# EAGLE board citizen-scientist-v3 (EAGLE 9.6.2)
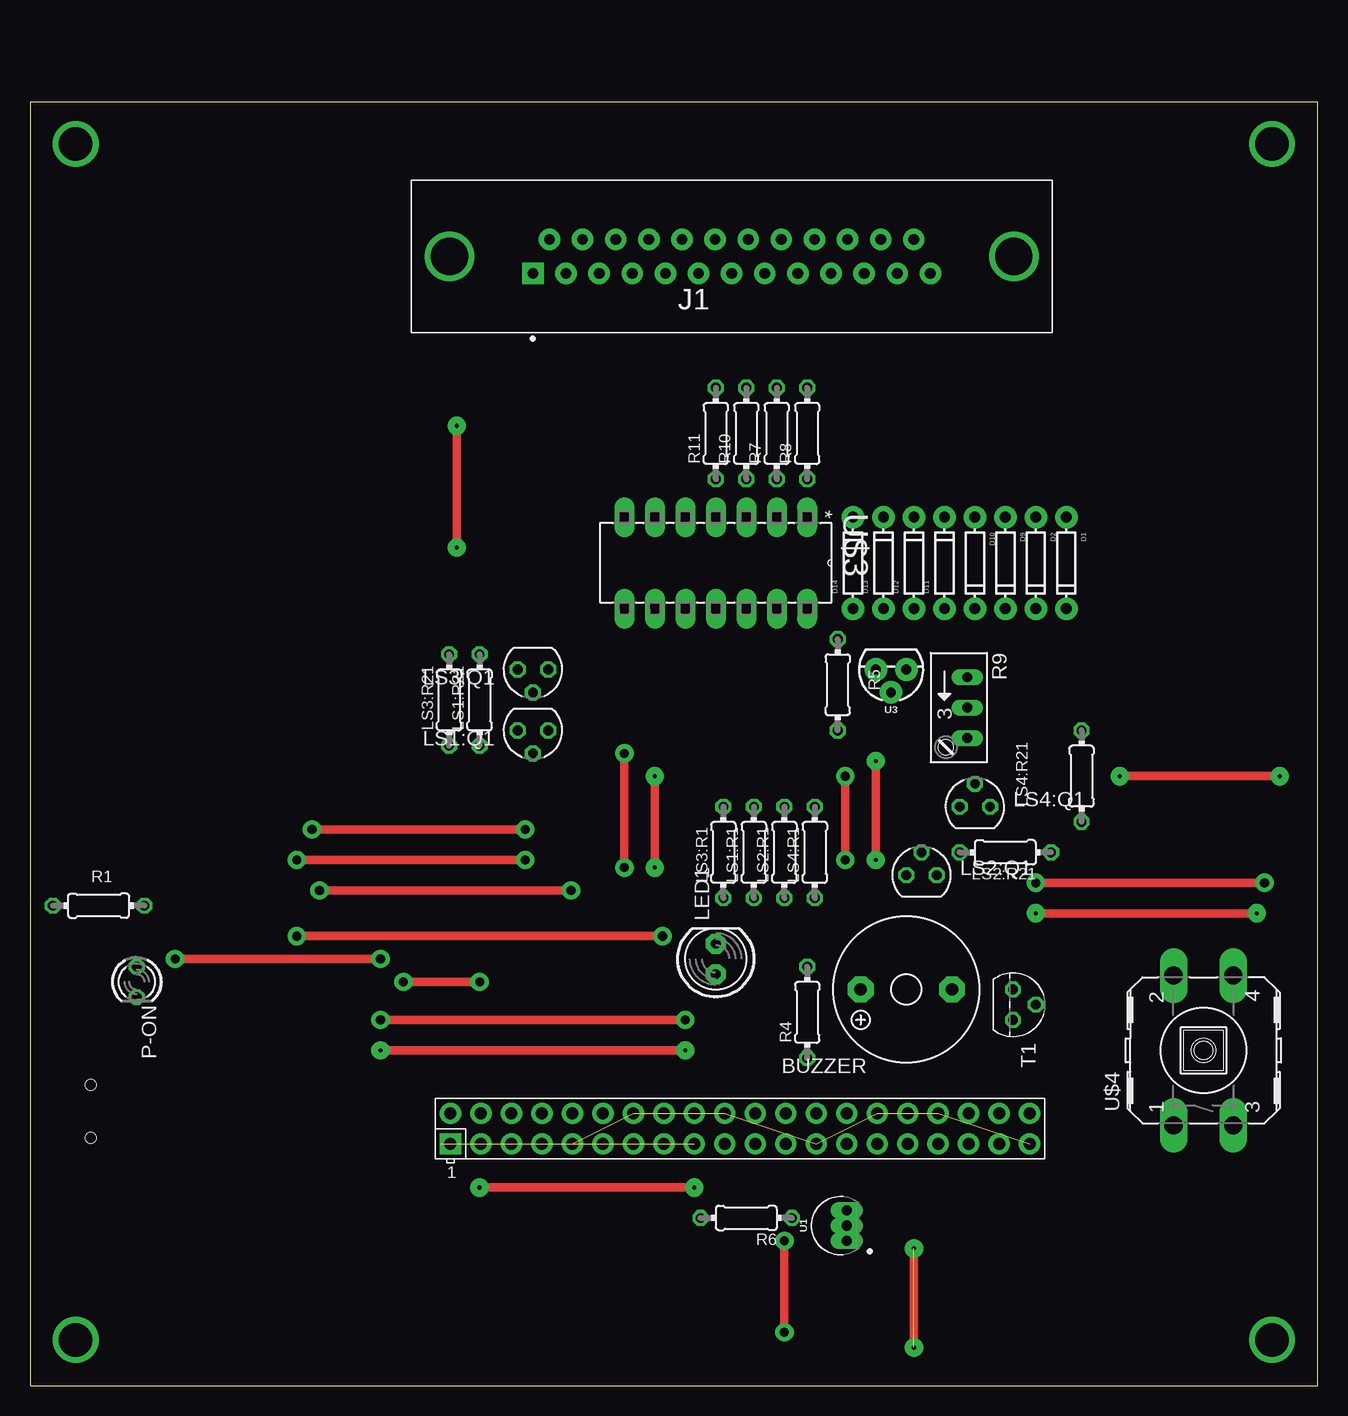
[diagram p0: board, top side]
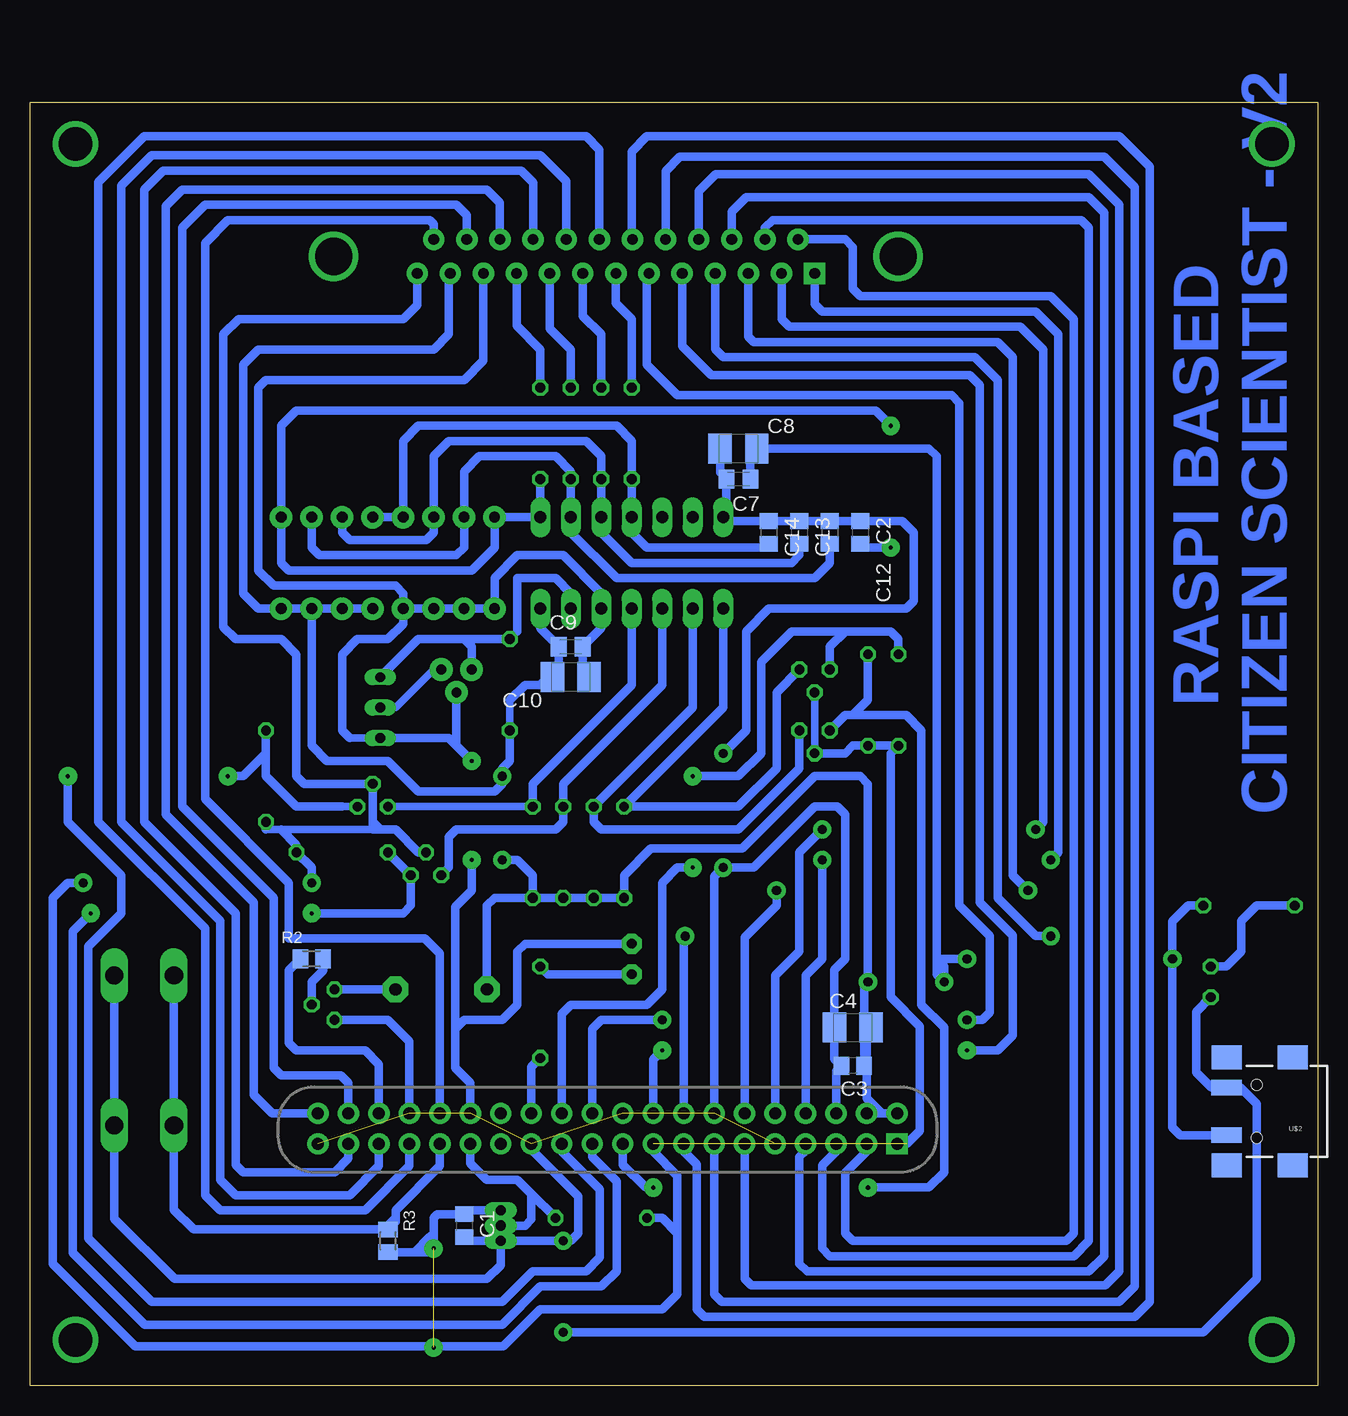
[diagram p1: board, bottom side, seen from below]

Size 107.3 x 106.98 mm. Coordinates in mm from the lower left corner, seen from the top.
Outline: 0,0 107.3,0 107.3,106.98 0,106.98 0,0
Copper layers (1*16): Top 0.035mm / dielectric 1.5mm / Bottom 0.035mm
Design rules "default *": minimum track width 6mil, minimum drill 0.35mm, track to track 6mil, track to pad 6mil, pad to pad 6mil, via to via 6mil, smd to smd 6mil, copper to edge 40mil, drill to drill 6mil, minimum pad ring 10mil, minimum via ring 8mil, stop-mask expansion 4mil, vias tented up to drill 0mil, thermal gap 10mil
Net classes: 0 default: width 0.406 mm

## Footprints (pad centres in the part's own frame; a part is rotated, then mirrored left to right if it is on the bottom)
F/TMB = drill 1.016 pad 2.159 octagon: + 3.81,0; - -3.81,0
C0805 = smd 1.3 x 1.5: 1 -0.95,0; 2 0.95,0
B/3528-21R = smd 1.95 x 2.5: + 1.525,0; - -1.525,0
C0805K = smd 1.3 x 1.6: 1 -1,0; 2 1,0
DIODE-1N4148 = drill 0.9 pad 1.88: A -3.81,0; C 3.81,0
D25S24A4GV00LF = drill 0.9 pad 1.778 square: 1 0,0 | drill 0.9 pad 1.778: 2 -2.76,0; 3 -5.52,0; 4 -8.28,0; 5 -11.04,0; 6 -13.8,0; 7 -16.56,0; 8 -19.32,0; 9 -22.08,0; 10 -24.84,0; 11 -27.6,0; 12 -30.36,0; 13 -33.12,0; 14 -1.38,-2.84; 15 -4.14,-2.84; 16 -6.9,-2.84; 17 -9.66,-2.84; 18 -12.42,-2.84; 19 -15.18,-2.84; 20 -17.94,-2.84; 21 -20.7,-2.84; 22 -23.46,-2.84; 23 -26.22,-2.84; 24 -28.98,-2.84; 25 -31.74,-2.84 | drill 3.1: MH1 -40.08,-1.42; MH2 6.96,-1.42
LED5MM = drill 0.813 pad 1.676 octagon: A -1.27,0; K 1.27,0
SOT54E = drill 0.813 octagon: D -1.27,0; G 0,1.905; S 1.27,0
0204/7 = drill 0.813 octagon: 1 -3.81,0; 2 3.81,0
LED3MM = drill 0.813 octagon: A -1.27,0; K 1.27,0
M0805 = smd 1.3 x 1.6: 1 -0.95,0; 2 0.95,0
RJ9W = drill 0.813 long: A 2.54,0.635; E -2.54,0.635; S 0,0.635
TO92 = drill 0.813 octagon: 1 1.27,0; 2 0,1.905; 3 -1.27,0
TO-92-TO92127P495H2044-3 = drill 0.85 pad 1.016 long: 1 -1.27,-0.76; 2 0,-0.76; 3 1.27,-0.76
TO-92 = drill 0.813 pad 1.88: 1 -1.27,0; 2 0,1.905; 3 1.27,0
RASP_PI_ZERO_BOARD_FULL = drill 1 pad 1.778 square: 1 8.37,25.23 | drill 1 pad 1.778: 2 8.37,27.77; 3 10.91,25.23; 4 10.91,27.77; 5 13.45,25.23; 6 13.45,27.77; 7 15.99,25.23; 8 15.99,27.77; 9 18.53,25.23; 10 18.53,27.77; 11 21.07,25.23; 12 21.07,27.77; 13 23.61,25.23; 14 23.61,27.77; 15 26.15,25.23; 16 26.15,27.77; 17 28.69,25.23; 18 28.69,27.77; 19 31.23,25.23; 20 31.23,27.77; 21 33.77,25.23; 22 33.77,27.77; 23 36.31,25.23; 24 36.31,27.77; 25 38.85,25.23; 26 38.85,27.77; 27 41.39,25.23; 28 41.39,27.77; 29 43.93,25.23; 30 43.93,27.77; 31 46.47,25.23; 32 46.47,27.77; 33 49.01,25.23; 34 49.01,27.77; 35 51.55,25.23; 36 51.55,27.77; 37 54.09,25.23; 38 54.09,27.77; 39 56.63,25.23; 40 56.63,27.77
USB(POWER) = smd 2.54 x 1.27: GND 2.5,-1.981; VBUS 2.5,1.981 | smd 2.5 x 2: GND@1 -3,-4.5; GND@2 -3,4.5; GND@3 2.5,4.5; GND@4 2.5,-4.5 | hole 0.9: 0,2.2; 0,-2.2
DIP254P762X432-14 = drill 0.991 pad 1.676 long: 1 -7.62,15.24; 2 -7.62,12.7; 3 -7.62,10.16; 4 -7.62,7.62; 5 -7.62,5.08; 6 -7.62,2.54; 7 -7.62,0; 8 0,0; 9 0,2.54; 10 0,5.08; 11 0,7.62; 12 0,10.16; 13 0,12.7; 14 0,15.24
B3F-40XX = drill 1.524 long: 1 -6.248,2.489; 2 6.248,2.489; 3 -6.248,-2.489; 4 6.248,-2.489

## Placement (x,y rotation side)
BUZZER  BUZZER  [F/TMB]  73.03,33.02 180 top
C1  0.1u  [C0805]  71.12,13.34 270 bottom
C2  1n  [C0805]  38.1,71.12 270 bottom
C3  0.1u  [C0805]  38.73,26.67 180 bottom
C4  10u  [B/3528-21R]  38.73,29.84 0 bottom
C7  0.1u  [C0805K]  48.26,75.56 180 bottom
C8  10u  [B/3528-21R]  48.26,78.11 0 bottom
C9  0.1u  [C0805K]  62.23,61.59 0 bottom
C10  10u  [B/3528-21R]  62.23,59.05 180 bottom
C12  1n  [C0805]  40.64,71.12 270 bottom
C13  1n  [C0805]  43.18,71.12 270 bottom
C14  1n  [C0805]  45.72,71.12 270 bottom
D1  [DIODE-1N4148]  86.36,68.58 270 top
D2  [DIODE-1N4148]  83.82,68.58 270 top
D9  [DIODE-1N4148]  81.28,68.58 270 top
D10  [DIODE-1N4148]  78.74,68.58 270 top
D11  [DIODE-1N4148]  76.2,68.58 90 top
D12  [DIODE-1N4148]  73.66,68.58 90 top
D13  [DIODE-1N4148]  71.12,68.58 90 top
D14  [DIODE-1N4148]  68.58,68.58 90 top
J1  D25S24A4GV00LF  [D25S24A4GV00LF]  41.91,92.71 180 top
LED1  [LED5MM]  57.15,35.56 90 top
LS1:Q1  BS170  [SOT54E]  41.91,54.61 180 top
LS1:R1  10k  [0204/7]  60.33,44.45 90 top
LS1:R21  10k  [0204/7]  37.47,57.15 90 top
LS2:Q1  BS170  [SOT54E]  74.3,42.55 0 top
LS2:R1  10k  [0204/7]  62.87,44.45 90 top
LS2:R21  10k  [0204/7]  81.28,44.45 180 top
LS3:Q1  BS170  [SOT54E]  41.91,59.69 180 top
LS3:R1  10k  [0204/7]  57.78,44.45 90 top
LS3:R21  10k  [0204/7]  34.92,57.15 90 top
LS4:Q1  BS170  [SOT54E]  78.74,48.26 0 top
LS4:R1  10k  [0204/7]  65.41,44.45 90 top
LS4:R21  10k  [0204/7]  87.63,50.8 90 top
P-ON  LED3MM  [LED3MM]  8.89,33.66 270 top
R1  4.7k  [0204/7]  5.71,40.01 0 top
R2  1k  [M0805]  83.82,35.56 0 bottom
R3  10k  [M0805]  77.47,12.06 270 bottom
R4  2.2k  [0204/7]  64.77,31.11 90 top
R5  150  [0204/7]  67.31,58.42 270 top
R6  4.7k  [0204/7]  59.69,13.97 180 top
R7  3.3k  [0204/7]  62.23,79.38 90 top
R8  3.3k  [0204/7]  64.77,79.38 90 top
R9  10k  [RJ9W]  77.47,56.52 270 top
R10  3.3k  [0204/7]  59.69,79.38 90 top
R11  3.3k  [0204/7]  57.15,79.38 90 top
T1  BC547  [TO92]  81.92,31.75 270 top
U1  DS18B20  [TO-92-TO92127P495H2044-3]  67.31,13.34 90 top
U3  TL431PTH  [TO-92]  71.75,59.69 180 top
U$1  RPI-ZERO  [RASP_PI_ZERO_BOARD_FULL]  26.67,-5.08 0 top
U$2  USB(POWER)  [USB(POWER)]  5.08,22.86 180 bottom
U$3  MCP3204-CI/P  [DIP254P762X432-14]  49.53,64.77 270 top
U$4  OMRON_SWITCH_40-XX  [B3F-40XX]  97.79,27.94 90 top

## Library data of the parts
BUZZER = CEDT_JANUARY_2015_v5; OC_FARNELL: unknown; OC_NEWARK: unknown
C1-C4 C7-C10 C12-C14 = rcl; SPICEPREFIX: C
D1 D2 D9-D14 = BeagleBone_Blue_R3
J1 = Connector_D-Sub; CATEGORY: Connector; DESCRIPTION: 25 Position D-Sub Receptacle, Female Sockets Connector; GENDER: Female; MANUFACTURER: amphenol-icc; MPN: D25S24A4GV00LF; OPERATING_TEMP: -55°C to +125°C; PART_STATUS: Active; ROHS_COMPLIANT: EU RoHS With Exemption 6c; SERIES: DELTA D; SUB-CATEGORY: D-SUB; TYPE: Vertical
LED1 = adafruit
LS1:Q1 LS2:Q1 LS3:Q1 LS4:Q1 = transistor-small-signal
LS1:R1 LS1:R21 LS2:R1 LS2:R21 LS3:R1 LS3:R21 LS4:R1 LS4:R21 R1-R8 R10 R11 = rcl; SPICEPREFIX: R
P-ON U$2 U$4 = CEDT_JANUARY_2015_v5
R9 = pot
T1 = transistor
U1 = DS18B20; AVAILABILITY: In Stock; DESCRIPTION: Temperature Sensor Digital, Local -55°C ~ 125°C 12 b 8-uMAX-EP|8-uSOP-EP; MF: Maxim; MP: DS18B20; PACKAGE: TO-226-3 Maxim; PRICE: None; PURCHASE-URL: https://pricing.snapeda.com/search/part/DS18B20/?ref=eda
U3 = SparkFun-DiscreteSemi; PROD_ID: IC-10947; SF_ID: COM-11078
U$1 = rpi-zero
U$3 = MCP3204-CI_P; AVAILABILITY: In Stock; DESCRIPTION: 12 Bit Analog to Digital Converter 2, 4 Input 1 SAR 14-PDIP; MF: Microchip; MP: MCP3204-CI/P; PACKAGE: DIP-14 Microchip; PRICE: None; PURCHASE-URL: https://pricing.snapeda.com/search/part/MCP3204-CI/P/?ref=eda

## Nets
+3V3: C1.1 J1.13 LS1:Q1.G LS1:R21.1 LS2:Q1.G LS2:R21.1 LS3:Q1.G LS3:R21.1 LS4:Q1.G LS4:R21.1 R3.2 R6.2 U1.3 U$1.1 U$1.17
+5V: BUZZER.+ C3.1 C4.+ C7.1 C8.+ C9.1 C10.+ D1.C D2.C D9.C D10.C J1.12 LS1:R1.1 LS2:R1.1 LS3:R1.1 LS4:R1.1 R1.2 R5.2 U$1.2 U$1.4 U$2.VBUS U$3.14
ADC-0: J1.10 R8.2
ADC-1: J1.9 R7.2
ADC-2: J1.8 R10.2
ADC-3: J1.7 R11.2
BUTTON: R3.1 U$1.31 U$4.1 U$4.2
BUZZER: R2.1 U$1.36
CLK-3: LS4:Q1.S LS4:R21.2 U$1.23
CLK-5: LS4:Q1.D LS4:R1.2 U$3.11
CS-3: LS3:Q1.S LS3:R21.2 U$1.24
CS-5: LS3:Q1.D LS3:R1.2 U$3.8
GCKL: J1.16 U$1.7
GND: C1.2 C2.1 C3.2 C4.- C7.2 C8.- C9.2 C10.- C12.1 C13.1 C14.1 D11.A D12.A D13.A D14.A J1.11 LED1.K P-ON.K R9.A T1.1 U1.1 U3.2 U$1.6 U$1.9 U$1.14 U$1.20 U$1.25 U$1.30 U$1.34 U$1.39 U$2.GND U$3.7 U$3.12 U$4.3 U$4.4
IO17: J1.17 U$1.11
IO22: J1.19 U$1.15
IO23: J1.4 U$1.16
IO24: J1.5 U$1.18
IO25: J1.6 U$1.22
IO26: J1.22 U$1.37
IO27: J1.18 U$1.13
LED: R4.1 U$1.26
MISO-3: LS2:Q1.S LS2:R21.2 U$1.21
MISO-5: LS2:Q1.D LS2:R1.2 U$3.10
MOSI-3: LS1:Q1.S LS1:R21.2 U$1.19
MOSI-5: LS1:Q1.D LS1:R1.2 U$3.9
N$1: P-ON.A R1.1
N$2: U$1.27
N$4: U$1.28
N$8: R9.S U3.1
N$9: R5.1 R9.E U3.3 U$3.13
N$10: R2.2 T1.2
N$11: BUZZER.- T1.3
N$12: C2.2 D1.A D14.C R8.1 U$3.1
N$13: LED1.A R4.2
N$14: C12.2 D2.A D13.C R7.1 U$3.2
N$16: C13.2 D9.A D12.C R10.1 U$3.3
N$17: C14.2 D10.A D11.C R11.1 U$3.4
PWM0: J1.25 U$1.32
PWM1: J1.20 U$1.33
SCL: J1.15 U$1.5
SDA: J1.14 U$1.3
SPI1-CLK: J1.23 U$1.40
SPI1-CS: J1.3 U$1.12
SPI1-MISO: J1.21 U$1.35
SPI1-MOSI: J1.24 U$1.38
TEMP: R6.1 U1.2 U$1.29
UART-RX: J1.2 U$1.10
UART-TX: J1.1 U$1.8

## Tracks (layer width: path | path; a pad name or v marks a point on that pad's centre or on a via)
+3V3  (via drill 0.35 pad 1.52, 0.76 pad 1.52)  (2 unrouted)
  Top 0.711: v73.66,11.43 v73.66,3.17 | v83.82,41.91 v102.87,41.91
  Bottom 0.61: LS3:Q1.G LS1:Q1.G | 87.63,46.35 86.36,46.35 78.74,46.35
  Bottom 0.711: LS1:Q1.G 39.37,52.7 38.73,53.34 LS1:R21.1 LS3:R21.1 35.56,52.7 35.56,32.38 33.13,29.96 33.13,21.25 34.23,20.15 U$1.1 | U$1.17 55.36,19.52 53.34,17.5 53.34,12.7 | 53.34,12.7 53.34,7.62 54.61,6.35 64.77,6.35 67.84,3.28 73.56,3.28 | v102.87,41.91 104.14,41.91 105.41,40.64 105.41,10.16 98.53,3.28 73.56,3.28 | v83.82,41.91 83.82,43.18 LS2:R21.1 85.09,45.09 86.36,46.35 | 87.63,46.35 LS4:R21.1 | LS2:Q1.G 74.93,44.45 76.83,46.35 78.11,46.35 | 78.11,46.35 78.74,46.35 78.74,46.99 | J1.13 75.03,90.07 76.2,88.9 89.92,88.9 91.19,87.63 91.19,63.25 90.17,62.23 86.36,62.23 85.09,60.96 85.09,50.8 84.45,50.16 LS4:Q1.G 78.74,46.99 | R6.2 54.61,13.97 53.34,12.7 | 73.66,12.7 v73.66,11.43 | 78.74,46.99 78.11,46.35 | 73.97,12.38 75.25,11.12 R3.2 73.97,11.12 v73.66,11.43 | 73.97,12.38 73.66,12.7 | U1.3 70.8,14.61 C1.1 73.34,14.29 73.66,13.97 73.66,12.7 | 73.97,12.38 73.66,12.07 v73.66,11.43 | v73.66,3.17 73.56,3.28
+5V  (via drill 0.76 pad 1.52)
  Top 0.711: v37.47,33.66 v31.11,33.66 | v67.94,50.8 v67.94,43.81 | v29.21,35.56 v12.09,35.56
  Bottom 0.61: 67.31,57.15 R5.2
  Bottom 0.711: U$2.VBUS 11.43,20.88 12.09,21.54 v12.09,35.56 12.09,38.71 10.79,40.01 R1.2 | 36.31,22.69 37.58,23.96 37.58,26.46 | 36.31,22.69 U$1.2 | LS4:R1.1 LS2:R1.1 LS1:R1.1 LS3:R1.1 57.78,42.55 55.56,44.77 47.94,44.77 41.91,50.8 38.1,50.8 37.47,50.16 v37.47,33.66 37.78,33.34 C3.1 37.58,26.46 | LS4:R1.1 65.41,42.55 66.67,43.81 v67.94,43.81 | 31.75,35.56 31.11,34.92 v31.11,33.66 31.75,34.29 31.75,35.56 | 31.75,35.56 31.75,77.47 32.38,78.11 C8.+ 47.26,77.58 C7.1 | C4.+ 37.58,29.48 37.58,26.46 | 31.75,35.56 v29.21,35.56 | 63.5,59.69 63.23,59.96 C9.1 64.77,63.13 U$3.14 | 63.5,59.69 64.77,58.42 66.04,58.42 67.31,57.15 | R5.2 67.31,52.07 67.94,51.44 v67.94,50.8 67.94,50.16 68.58,49.53 74.93,49.53 77.47,52.07 82.55,52.07 83.82,53.34 D2.C | D2.C D9.C D10.C | D2.C D1.C 88.27,64.77 89.53,66.04 89.53,85.09 88.27,86.36 73.66,86.36 72.39,87.63 72.39,92.59 J1.12 | LS4:R1.1 68.58,40.64 69.22,40.01 BUZZER.+ | C10.+ 63.5,59.31 63.5,59.69 | U$1.4 36.31,22.69
ADC-0
  Bottom 0.711: R8.2 64.77,86.36 66.75,88.34 J1.10
ADC-1
  Bottom 0.711: R7.2 62.23,86.36 63.99,88.12 J1.9
ADC-2
  Bottom 0.711: R10.2 59.69,87.63 61.23,89.17 J1.8
ADC-3
  Bottom 0.711: R11.2 57.15,88.9 58.47,90.22 J1.7
BUTTON
  Bottom 0.711: U$1.31 73.14,18.3 76.83,14.61 76.83,13.97 | R3.1 76.83,13.65 76.83,13.97 | 76.83,13.97 77.79,13.02 93.66,13.02 95.3,14.66 U$4.1 U$4.2
BUZZER
  Bottom 0.711: U$1.36 78.22,26.04 78.22,26.48 78.22,26.79 79.38,27.94 85.09,27.94 85.72,28.57 85.72,34.6 R2.1
CLK-3  (via drill 0.35 pad 1.52)
  Top 0.711: v104.14,50.8 v90.81,50.8
  Bottom 0.61: 81.28,48.26 LS4:Q1.S
  Bottom 0.711: U$1.23 62.98,19.52 59.8,16.34 59.8,10.68 60.96,9.53 65.41,9.53 67.94,6.99 97.16,6.99 102.44,12.27 102.44,36.63 99.69,39.37 99.69,42.55 104.14,46.99 v104.14,50.8 | v90.81,50.8 89.53,50.8 87.63,52.7 LS4:R21.2 87.63,50.8 85.09,48.26 81.28,48.26
CLK-5
  Bottom 0.61: LS4:Q1.D LS4:R1.2
  Bottom 0.711: LS4:R1.2 65.41,50.16 57.15,58.42 U$3.11
CS-3  (via drill 0.35 pad 1.52)
  Top 0.711: v52.07,43.18 v52.07,50.8
  Bottom 0.711: LS3:R21.2 34.92,62.23 35.56,62.87 39.37,62.87 | LS3:Q1.S 40.64,61.59 39.37,62.87 | U$1.24 62.98,31 62.23,31.75 55.88,31.75 54.61,33.02 54.61,41.91 53.34,43.18 v52.07,43.18 | 39.37,62.87 43.81,62.87 46.35,60.33 46.35,52.7 48.26,50.8 v52.07,50.8
CS-5
  Bottom 0.711: LS3:Q1.D 45.09,57.78 45.09,51.44 48.26,48.26 LS3:R1.2 49.53,56.52 U$3.8
GCKL
  Bottom 0.711: U$1.7 42.66,19.57 43.18,19.05 43.18,10.16 42.55,9.53 19.05,9.53 17.78,10.79 17.78,97.79 19.05,99.06 47.62,99.06 48.81,97.88 J1.16
GND  (via drill 0.35 pad 1.52, 0.76 pad 1.52)  (6 unrouted)
  Top 0.711: v49.53,52.7 v49.53,43.18 | v62.87,12.06 v62.87,4.45 | v70.48,43.81 v70.48,52.07
  Bottom 0.61: 76.83,53.98 R9.A 80.64,53.98
  Bottom 0.711: P-ON.K 10.12,31.16 10.12,26.11 8.85,24.84 U$2.GND 6.43,24.84 5.08,23.5 5.08,8.89 9.53,4.45 v62.87,4.45 | U$1.14 50.28,42.43 v49.53,43.18 46.99,43.18 41.91,48.26 40.01,48.26 39.37,47.62 39.37,35.56 40.26,34.67 C4.- 40.26,27.25 C3.2 40.12,26.23 U$1.6 | U$1.25 65.52,19.68 61.59,15.76 61.59,12.7 62.23,12.06 v62.87,12.06 U1.1 | C8.- 49.78,76.09 C7.2 49.26,72.66 U$3.7 49.21,72.07 C14.1 C13.1 C12.1 C2.1 34.6,72.07 33.66,71.12 33.66,65.41 34.29,64.77 45.72,64.77 47.62,62.87 47.62,54.61 v49.53,52.7 | C10.- 60.7,59.44 61.23,59.96 C9.2 59.69,63.13 U$3.12 59.69,66.04 62.87,69.22 66.67,69.22 68.58,67.31 D14.A D13.A D12.A D11.A | 71.87,29.73 71.87,39.89 70.48,41.27 v70.48,43.81 | 71.87,29.73 71.87,26.5 70.6,25.23 U$1.30 | v70.48,52.07 71.75,53.34 | 71.75,53.34 U3.2 | J1.11 69.51,85.43 71.12,83.82 87.63,83.82 88.27,83.19 88.27,67.94 87,66.67 76.83,66.67 76.2,66.04 D11.A | 80.64,53.98 81.28,54.61 81.28,60.96 80.01,62.23 77.47,62.23 76.2,63.5 D11.A | LED1.K 66.04,36.83 66.67,36.2 66.67,31.75 67.94,30.48 71.12,30.48 71.87,29.73 | C1.2 70.8,12.06 U1.1 | U$1.34 75.68,28.69 77.47,30.48 T1.1 | U1.1 68.07,10.04 69.22,8.89 95.25,8.89 100.28,13.92 U$4.3 U$4.4 | R9.A 72.39,53.98 71.75,53.34
IO17
  Bottom 0.711: U$1.11 47.74,8.89 47.2,8.35 17.68,8.35 16.51,9.53 16.51,98.42 19.05,100.97 50.16,100.97 51.57,99.56 J1.17
IO22
  Bottom 0.711: U$1.15 52.82,19.52 51.75,18.45 51.75,6.35 51.12,5.71 15.24,5.71 13.97,6.99 13.97,101.6 16.51,104.14 55.88,104.14 57.15,102.87 57.15,95.61 J1.19
IO23  (via drill 0.76 pad 1.52)
  Top 0.711: v52.7,37.47 v22.23,37.47
  Bottom 0.711: J1.4 50.19,86.39 49.53,85.72 28.57,85.72 26.67,83.82 26.67,40.64 23.5,37.47 v22.23,37.47 | v52.7,37.47 52.82,37.35 U$1.16
IO24  (via drill 0.35 pad 1.52)
  Top 0.711: v54.61,27.94 v29.21,27.94
  Bottom 0.711: U$1.18 55.36,27.19 v54.61,27.94 | v29.21,27.94 26.67,27.94 25.4,29.21 25.4,37.51 28.17,40.28 28.17,83.41 28.98,84.23 50.52,84.23 52.96,86.66 J1.5
IO25  (via drill 0.76 pad 1.52)
  Top 0.711: v54.61,30.48 v29.21,30.48
  Bottom 0.711: v29.21,30.48 27.94,30.48 27.3,31.11 27.3,37.47 29.84,40.01 29.84,81.92 30.48,82.55 53.34,82.55 55.88,85.09 55.88,92.54 J1.6 | v54.61,30.48 59.69,30.48 60.44,29.73 U$1.22
IO26
  Bottom 0.711: U$1.37 80.76,18.93 81.92,17.78 89.53,17.78 90.17,18.41 90.17,39.37 97.79,46.99 97.79,99.69 96.2,101.28 66.36,101.28 65.37,100.3 J1.22
IO27
  Bottom 0.711: U$1.13 50.28,7.62 49.65,6.99 16.51,6.99 15.24,8.26 15.24,99.9 17.78,102.44 53.14,102.44 54.33,101.25 J1.18
LED
  Bottom 0.711: U$1.26 65.52,26.55 R4.1
MISO-3  (via drill 0.35 pad 1.52)
  Top 0.711: v102.23,39.37 v83.82,39.37
  Bottom 0.711: U$1.21 60.44,19.05 58.42,17.03 58.42,9.53 59.69,8.26 64.77,8.26 67.94,5.08 97.74,5.08 103.73,11.07 103.73,37.87 v102.23,39.37 | LS2:R21.2 LS2:Q1.S 75.56,40.01 76.2,39.37 v83.82,39.37
MISO-5
  Bottom 0.711: LS2:Q1.D 72.39,43.18 72.39,45.72 71.75,46.35 63.5,46.35 62.87,46.99 LS2:R1.2 62.87,50.16 54.61,58.42 U$3.10
MOSI-3  (via drill 0.35 pad 1.52)
  Top 0.711: v55.36,16.51 v37.47,16.51
  Bottom 0.711: U$1.19 57.9,18.41 55.99,16.51 v55.36,16.51 | LS1:R21.2 37.47,57.15 38.73,55.88 | LS1:Q1.S 39.37,55.88 38.73,55.88 | v37.47,16.51 32.38,16.51 31.11,17.78 31.11,29.84 33.02,31.75 33.02,54.61 34.29,55.88 38.73,55.88
MOSI-5
  Bottom 0.711: LS1:Q1.D 43.18,51.44 48.26,46.35 59.69,46.35 60.33,46.99 LS1:R1.2 52.07,56.52 U$3.9
N$1
  Bottom 0.711: R1.1 5.08,40.01 6.35,38.73 6.35,36.2 7.62,34.92 P-ON.A
N$3  (via drill 2.79 pad 3.81)
  other vias: 3.81,103.5
N$5  (via drill 2.79 pad 3.81)
  other vias: 103.5,103.5
N$6  (via drill 2.79 pad 3.81)
  other vias: 103.5,3.81
N$7  (via drill 2.79 pad 3.81)
  other vias: 3.81,3.81
N$8
  Bottom 0.61: U3.1 73.66,59.69 76.83,56.52 R9.S
N$9
  Bottom 0.61: R5.1 66.67,62.87
  Bottom 0.711: U$3.13 62.23,66.04 63.5,67.31 66.67,67.31 66.67,62.87 | R9.E 74.93,62.23 71.12,62.23 | 71.12,62.23 R5.1 | U3.3 70.48,61.59 71.12,62.23
N$10
  Bottom 0.711: R2.2 82.87,34.6 83.82,33.66 T1.2
N$11
  Bottom 0.711: BUZZER.- T1.3
N$12  (via drill 0.35 pad 1.52)
  Top 0.711: v35.56,69.85 v35.56,80.01
  Bottom 0.711: R8.1 U$3.1 D14.C 68.58,69.85 70.48,67.94 85.72,67.94 86.36,68.58 D1.A 86.36,80.01 85.09,81.28 36.83,81.28 v35.56,80.01 | C2.2 37.78,69.85 v35.56,69.85
N$13
  Bottom 0.711: LED1.A 64.14,34.29 R4.2
N$14
  Bottom 0.711: C12.2 40.64,68.58 41.91,67.31 58.42,67.31 62.23,71.12 U$3.2 R7.1 62.23,76.2 63.5,77.47 69.85,77.47 71.12,76.2 D13.C 71.12,69.85 71.75,69.22 83.19,69.22 83.82,69.85 D2.A
N$16
  Bottom 0.711: U$3.3 59.69,77.47 60.96,78.74 72.39,78.74 73.66,77.47 D12.C 73.66,71.12 74.3,70.48 80.64,70.48 81.28,71.12 D9.A | U$3.3 59.69,71.12 57.15,68.58 43.81,68.58 43.18,69.22 C13.2 | R10.1 U$3.3
N$17
  Bottom 0.711: U$3.4 57.15,78.74 58.42,80.01 74.93,80.01 76.2,78.74 D11.C D10.A | C14.2 46.04,69.85 55.88,69.85 57.15,71.12 U$3.4 | R11.1 U$3.4
PWM0
  Bottom 0.711: U$1.32 73.14,36.02 74.41,37.3 85.72,37.3 85.72,41.91 92.71,48.9 92.71,95.25 90.81,97.16 73.98,97.16 73.65,96.82 J1.25
PWM1
  Bottom 0.711: U$1.33 75.68,18.3 79.38,14.61 91.44,14.61 92.71,15.88 92.71,38.1 101.6,46.99 101.6,100.33 97.79,104.14 60.96,104.14 59.85,103.03 J1.20
SCL
  Bottom 0.711: U$1.5 40.12,19.52 41.27,18.36 41.27,11.43 40.64,10.79 20.32,10.79 19.05,12.06 19.05,96.52 19.68,97.16 45.41,97.16 46.05,96.52 J1.15
SDA
  Bottom 0.711: J1.14 39.37,95.55 38.73,94.92 38.73,91.44 38.1,90.81 22.23,90.81 20.32,88.9 20.32,12.7 20.95,12.06 38.73,12.06 39.37,12.7 39.37,17.73 37.58,19.52 U$1.3
SPI1-CLK
  Bottom 0.711: U$1.40 87.11,22.69 88.64,24.22 88.64,40.27 96,47.62 96,98.31 94.61,99.69 69.22,99.69 68.13,98.61 J1.23
SPI1-CS  (via drill 0.76 pad 1.52)
  Top 0.711: v24.13,41.27 v45.09,41.27
  Bottom 0.711: J1.3 47.43,87.44 46.99,87 26.67,87 25.4,85.72 25.4,42.55 v24.13,41.27 | v45.09,41.27 45.09,40.01 47.74,37.35 U$1.12
SPI1-MISO
  Bottom 0.711: U$1.35 78.22,18.3 80.64,15.88 90.17,15.88 91.44,17.14 91.44,38.73 99.69,46.99 99.69,100.01 97.16,102.55 64.77,102.55 62.61,100.39 J1.21
SPI1-MOSI
  Bottom 0.711: U$1.38 80.76,25.23 81.39,25.86 86.36,25.86 87,26.5 87,40.64 94.61,48.26 94.61,96.52 92.71,98.42 71.75,98.42 70.89,97.56 J1.24
TEMP
  Bottom 0.711: R6.1 65.52,15.99 | 65.52,15.99 66.67,17.14 69.22,17.14 70.6,18.53 U$1.29 | U1.2 66.04,13.34 65.52,13.86 65.52,15.99
UART-RX  (via drill 0.76 pad 1.52)
  Top 0.711: v23.5,46.35 v41.27,46.35
  Bottom 0.711: J1.2 44.67,88.9 44.03,88.27 24.77,88.27 22.86,86.36 22.86,46.99 v23.5,46.35 | U$1.10 45.2,34.17 43.18,36.2 43.18,44.45 v41.27,46.35
UART-TX  (via drill 0.76 pad 1.52)
  Top 0.711: v41.27,43.81 v22.23,43.81
  Bottom 0.711: J1.1 41.91,90.17 41.27,89.53 23.5,89.53 21.59,87.63 21.59,44.45 v22.23,43.81 | U$1.8 42.66,34.17 41.27,35.56 v41.27,43.81

## Text on the board
Bottom: RASPI BASED / CITIZEN SCIENTIST - V2